# Altium PCB demo_board_dirty_routed_ddr.PcbDoc
Units mil, origin at the board's own origin, x right, y up, seen from the top; angles counter-clockwise.
Board outline 6000 x 4000 mil, 2 copper layers (Top Layer, Bottom Layer); 2 components, 43 nets, 316 pads, 70 vias.
Unrouted connection lines stored in the file: 75.
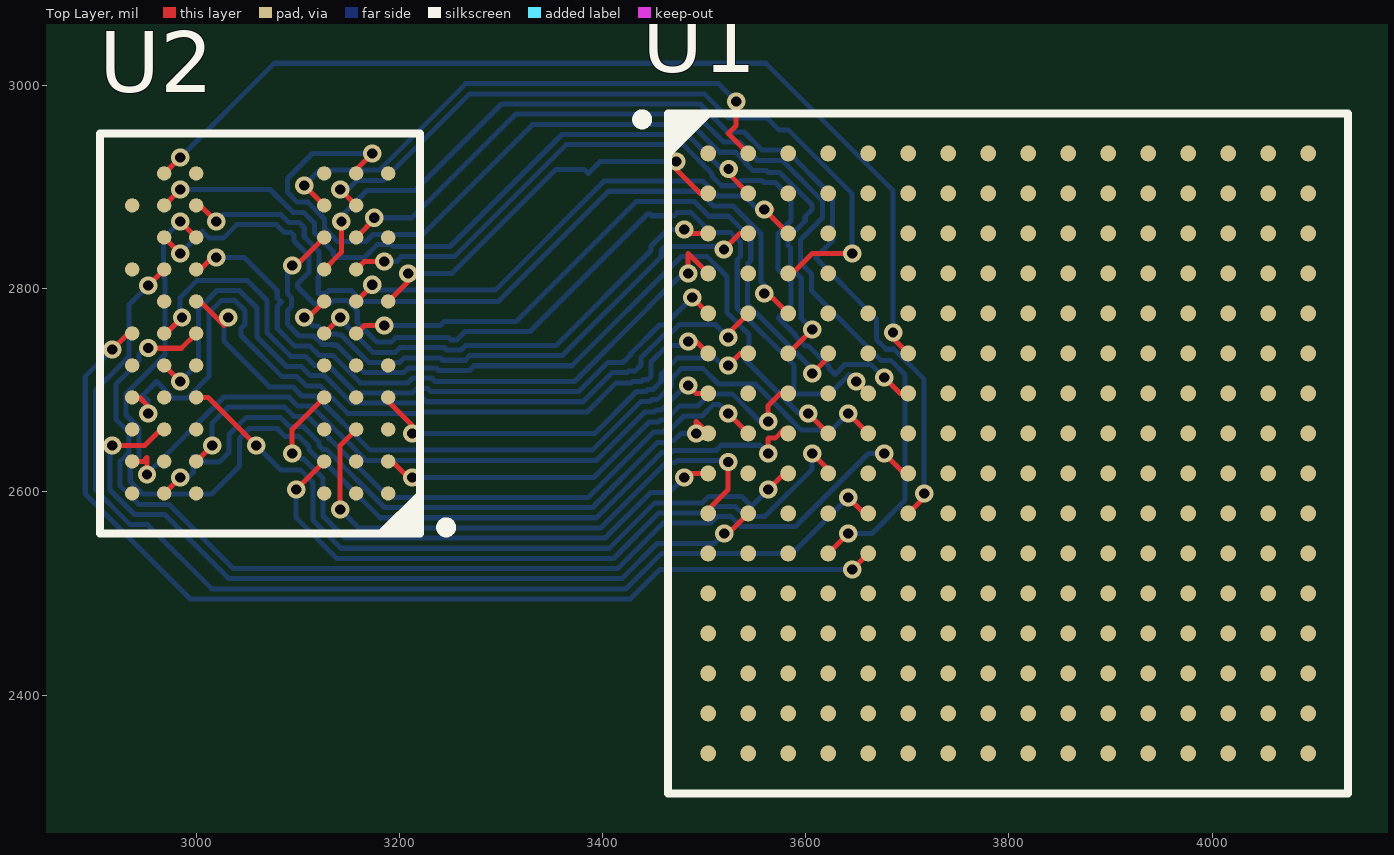
[diagram p0: Top Layer view]
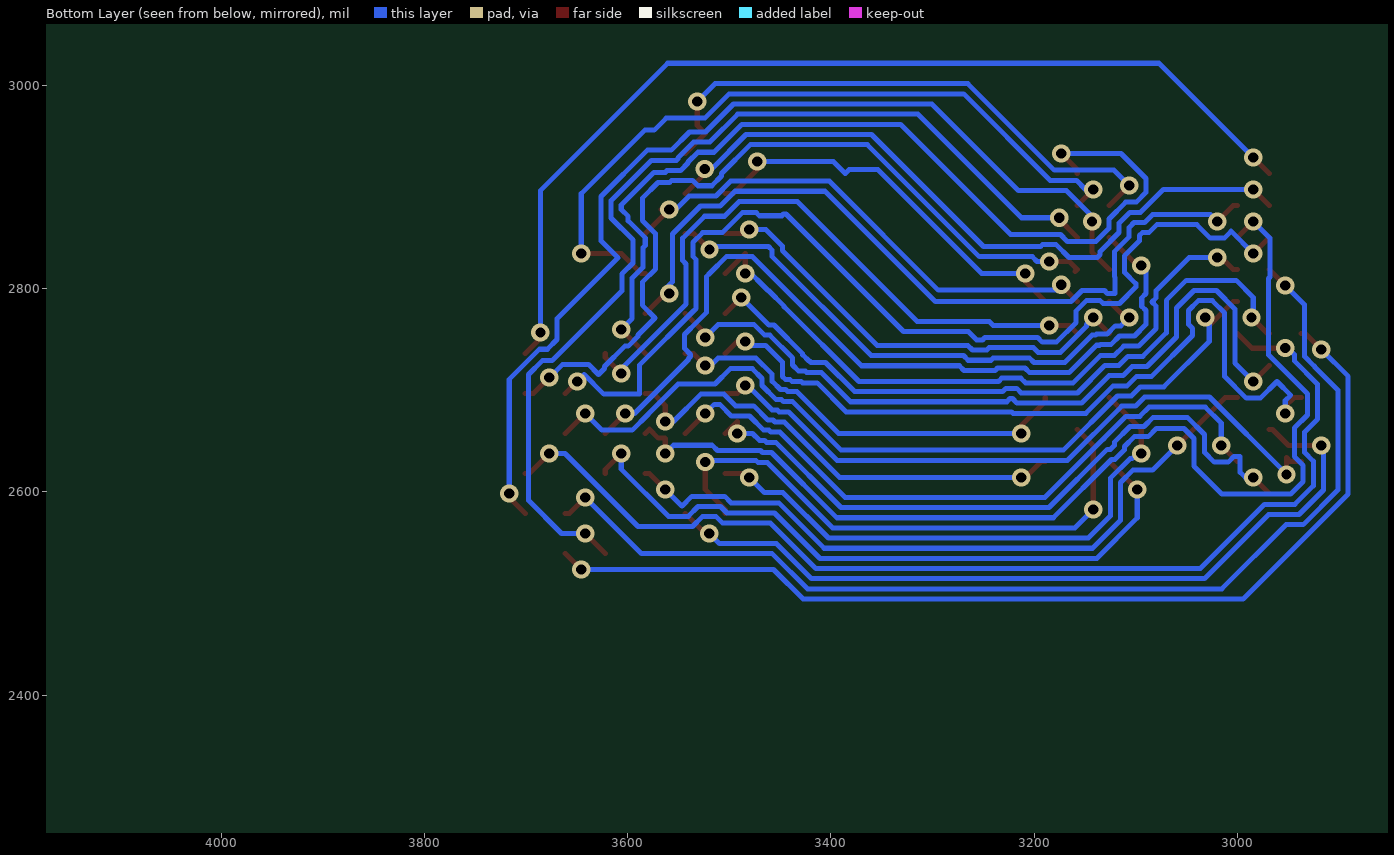
[diagram p1: Bottom Layer view, seen from below]

## Layer stack, top to bottom
Top Solder: solder mask 0.4, Solder Resist, Dk 3.5
Top Layer: signal copper 1.4
Dielectric 1: dielectric 12.6, FR-4, Dk 4.8
Bottom Layer: signal copper 1.4
Bottom Solder: solder mask 0.4, Solder Resist, Dk 3.5

## Board outline
1000,1000 7000,1000 7000,5000 1000,5000

## Design rules (kind name [scope] priority, off if disabled: settings)
Clearance [All] p1: gap=5
HoleSize [All] p1: absolutevalues=TRUE maxlimit=100 minlimit=10 maxpercent=80.000 minpercent=20.000
MinimumAnnularRing [All] p1: minimumring=4
PolygonConnect [All] p1: connectstyle=Relief reliefconductorwidth=10 reliefentries=4 polygonreliefangle="90 Angle" airgapwidth=10
RoutingVias [All] p1: holewidth=10 width=32 viastyle="Through Hole" minholewidth=10 minwidth=18 maxholewidth=50 maxwidth=100
SolderMaskExpansion [All] p1: expansion=4
UnpouredPolygon [All] p1: allowunpoured=FALSE
Width [All] p1: maxlimit=100 minlimit=5 preferedwidth=10
28 further rules are at their usual default settings.

## Classes and differential pairs
net class DDR: A0 A1 A2 A3 A4 A5 A6 A7 A8 A9 A10 A11 A12 A13 BA0 BA1 BA2 CAS# CK CK# CKE DM/RDQS DQ0 DQ1 DQ2 DQ3 DQ4 DQ5 DQ6 DQ7 DQS DQS# NetU2_A2 ODT RAS# WE#

## Components (designator, comment, footprint, x,y, rotation, side; value= is the part's Value field where it differs from the comment)
U1 "XC6SLX16-2FTG256C" Xilinx_FT256 3799.21,2637.8 r0 top
U2 "AS4C128M8D2-25BCN" Alliance_FBGA60 3062.99,2755.91 r180 top

## Footprints (in the part's own frame and the unit in brackets; to place one, negate y for a bottom-side part, rotate by r counter-clockwise, add the part's x,y. Pads: shape width x height; smd on the part's side, far side on the other; paste and mask are expansions set on the pad)
Alliance_FBGA60 [mm] "BGA, 60-Leads, Body 8.00x10.00mmx1.20mm, Pitch 0.80mm"
  round 0.36 smd: A1(-3.2,4) A2(-2.4,4) A3(-1.6,4) A7(1.6,4) A8(2.4,4) A9(3.2,4) B1(-3.2,3.2) B2(-2.4,3.2) B3(-1.6,3.2) B7(1.6,3.2) B8(2.4,3.2) B9(3.2,3.2) C1(-3.2,2.4) C2(-2.4,2.4) C3(-1.6,2.4) C7(1.6,2.4) C8(2.4,2.4) C9(3.2,2.4) D1(-3.2,1.6) D2(-2.4,1.6) D3(-1.6,1.6) D7(1.6,1.6) D8(2.4,1.6) D9(3.2,1.6) E1(-3.2,0.8) E2(-2.4,0.8) E3(-1.6,0.8) E7(1.6,0.8) E8(2.4,0.8) E9(3.2,0.8) F2(-2.4,0) F3(-1.6,0) F7(1.6,0) F8(2.4,0) F9(3.2,0) G1(-3.2,-0.8) G2(-2.4,-0.8) G3(-1.6,-0.8) G7(1.6,-0.8) G8(2.4,-0.8) H2(-2.4,-1.6) H3(-1.6,-1.6) H7(1.6,-1.6) H8(2.4,-1.6) H9(3.2,-1.6) J1(-3.2,-2.4) J2(-2.4,-2.4) J3(-1.6,-2.4) J7(1.6,-2.4) J8(2.4,-2.4) K2(-2.4,-3.2) K3(-1.6,-3.2) K7(1.6,-3.2) K8(2.4,-3.2) K9(3.2,-3.2) L1(-3.2,-4) L2(-2.4,-4) L3(-1.6,-4) L7(1.6,-4) L8(2.4,-4)
  silkscreen extent -4.78,-5 4,5, body extent -4,-5 4,5, height 1.2
Xilinx_FT256 [mm] "BGA, 256-Leads, Body 17.00x17.00mmx1.55mm, Pitch 1.00mm"
  round 0.4 smd: A1(-7.5,7.5) A2(-6.5,7.5) A3(-5.5,7.5) A4(-4.5,7.5) A5(-3.5,7.5) A6(-2.5,7.5) A7(-1.5,7.5) A8(-0.5,7.5) A9(0.5,7.5) A10(1.5,7.5) A11(2.5,7.5) A12(3.5,7.5) A13(4.5,7.5) A14(5.5,7.5) A15(6.5,7.5) A16(7.5,7.5) B1(-7.5,6.5) B2(-6.5,6.5) B3(-5.5,6.5) B4(-4.5,6.5) B5(-3.5,6.5) B6(-2.5,6.5) B7(-1.5,6.5) B8(-0.5,6.5) B9(0.5,6.5) B10(1.5,6.5) B11(2.5,6.5) B12(3.5,6.5) B13(4.5,6.5) B14(5.5,6.5) B15(6.5,6.5) B16(7.5,6.5) C1(-7.5,5.5) C2(-6.5,5.5) C3(-5.5,5.5) C4(-4.5,5.5) C5(-3.5,5.5) C6(-2.5,5.5) C7(-1.5,5.5) C8(-0.5,5.5) C9(0.5,5.5) C10(1.5,5.5) C11(2.5,5.5) C12(3.5,5.5) C13(4.5,5.5) C14(5.5,5.5) C15(6.5,5.5) C16(7.5,5.5) D1(-7.5,4.5) D2(-6.5,4.5) D3(-5.5,4.5) D4(-4.5,4.5) D5(-3.5,4.5) D6(-2.5,4.5) D7(-1.5,4.5) D8(-0.5,4.5) D9(0.5,4.5) D10(1.5,4.5) D11(2.5,4.5) D12(3.5,4.5) D13(4.5,4.5) D14(5.5,4.5) D15(6.5,4.5) D16(7.5,4.5) E1(-7.5,3.5) E2(-6.5,3.5) E3(-5.5,3.5) E4(-4.5,3.5) E5(-3.5,3.5) E6(-2.5,3.5) E7(-1.5,3.5) E8(-0.5,3.5) E9(0.5,3.5) E10(1.5,3.5) E11(2.5,3.5) E12(3.5,3.5) E13(4.5,3.5) E14(5.5,3.5) E15(6.5,3.5) E16(7.5,3.5) F1(-7.5,2.5) F2(-6.5,2.5) F3(-5.5,2.5) F4(-4.5,2.5) F5(-3.5,2.5) F6(-2.5,2.5) F7(-1.5,2.5) F8(-0.5,2.5) F9(0.5,2.5) F10(1.5,2.5) F11(2.5,2.5) F12(3.5,2.5) F13(4.5,2.5) F14(5.5,2.5) F15(6.5,2.5) F16(7.5,2.5) G1(-7.5,1.5) G2(-6.5,1.5) G3(-5.5,1.5) G4(-4.5,1.5) G5(-3.5,1.5) G6(-2.5,1.5) G7(-1.5,1.5) G8(-0.5,1.5) G9(0.5,1.5) G10(1.5,1.5) G11(2.5,1.5) G12(3.5,1.5) G13(4.5,1.5) G14(5.5,1.5) G15(6.5,1.5) G16(7.5,1.5) H1(-7.5,0.5) H2(-6.5,0.5) H3(-5.5,0.5) H4(-4.5,0.5) H5(-3.5,0.5) H6(-2.5,0.5) H7(-1.5,0.5) H8(-0.5,0.5) H9(0.5,0.5) H10(1.5,0.5) H11(2.5,0.5) H12(3.5,0.5) H13(4.5,0.5) H14(5.5,0.5) H15(6.5,0.5) H16(7.5,0.5) J1(-7.5,-0.5) J2(-6.5,-0.5) J3(-5.5,-0.5) J4(-4.5,-0.5) J5(-3.5,-0.5) J6(-2.5,-0.5) J7(-1.5,-0.5) J8(-0.5,-0.5) J9(0.5,-0.5) J10(1.5,-0.5) J11(2.5,-0.5) J12(3.5,-0.5) J13(4.5,-0.5) J14(5.5,-0.5) J15(6.5,-0.5) J16(7.5,-0.5) K1(-7.5,-1.5) K2(-6.5,-1.5) K3(-5.5,-1.5) K4(-4.5,-1.5) K5(-3.5,-1.5) K6(-2.5,-1.5) K7(-1.5,-1.5) K8(-0.5,-1.5) K9(0.5,-1.5) K10(1.5,-1.5) K11(2.5,-1.5) K12(3.5,-1.5) K13(4.5,-1.5) K14(5.5,-1.5) K15(6.5,-1.5) K16(7.5,-1.5) L1(-7.5,-2.5) L2(-6.5,-2.5) L3(-5.5,-2.5) L4(-4.5,-2.5) L5(-3.5,-2.5) L6(-2.5,-2.5) L7(-1.5,-2.5) L8(-0.5,-2.5) L9(0.5,-2.5) L10(1.5,-2.5) L11(2.5,-2.5) L12(3.5,-2.5) L13(4.5,-2.5) L14(5.5,-2.5) L15(6.5,-2.5) L16(7.5,-2.5) M1(-7.5,-3.5) M2(-6.5,-3.5) M3(-5.5,-3.5) M4(-4.5,-3.5) M5(-3.5,-3.5) M6(-2.5,-3.5) M7(-1.5,-3.5) M8(-0.5,-3.5) M9(0.5,-3.5) M10(1.5,-3.5) M11(2.5,-3.5) M12(3.5,-3.5) M13(4.5,-3.5) M14(5.5,-3.5) M15(6.5,-3.5) M16(7.5,-3.5) N1(-7.5,-4.5) N2(-6.5,-4.5) N3(-5.5,-4.5) N4(-4.5,-4.5) N5(-3.5,-4.5) N6(-2.5,-4.5) N7(-1.5,-4.5) N8(-0.5,-4.5) N9(0.5,-4.5) N10(1.5,-4.5) N11(2.5,-4.5) N12(3.5,-4.5) N13(4.5,-4.5) N14(5.5,-4.5) N15(6.5,-4.5) N16(7.5,-4.5) P1(-7.5,-5.5) P2(-6.5,-5.5) P3(-5.5,-5.5) P4(-4.5,-5.5) P5(-3.5,-5.5) P6(-2.5,-5.5) P7(-1.5,-5.5) P8(-0.5,-5.5) P9(0.5,-5.5) P10(1.5,-5.5) P11(2.5,-5.5) P12(3.5,-5.5) P13(4.5,-5.5) P14(5.5,-5.5) P15(6.5,-5.5) P16(7.5,-5.5) R1(-7.5,-6.5) R2(-6.5,-6.5) R3(-5.5,-6.5) R4(-4.5,-6.5) R5(-3.5,-6.5) R6(-2.5,-6.5) R7(-1.5,-6.5) R8(-0.5,-6.5) R9(0.5,-6.5) R10(1.5,-6.5) R11(2.5,-6.5) R12(3.5,-6.5) R13(4.5,-6.5) R14(5.5,-6.5) R15(6.5,-6.5) R16(7.5,-6.5) T1(-7.5,-7.5) T2(-6.5,-7.5) T3(-5.5,-7.5) T4(-4.5,-7.5) T5(-3.5,-7.5) T6(-2.5,-7.5) T7(-1.5,-7.5) T8(-0.5,-7.5) T9(0.5,-7.5) T10(1.5,-7.5) T11(2.5,-7.5) T12(3.5,-7.5) T13(4.5,-7.5) T14(5.5,-7.5) T15(6.5,-7.5) T16(7.5,-7.5)
  silkscreen extent -9.27,-8.5 8.5,8.5, body extent -8.5,-8.5 8.5,8.5, height 1.55

## Via types
v1: diameter 18, hole 10, Top Layer to Bottom Layer, 70 vias

## Nets (pads, with @x,y where several pads share a name; then routed paths per layer and width w, separated by ;. In a path a pad name is that pad's centre, name@x,y a point inside that pad or via, vN(x,y) a via of type N, cw(c..) or ccw(c..) an arc to the next point about the centre after c; other vN are vias at no path point)
A0: U1.K5 U2.H8 | length 1089.7
  Top Layer w5: v1(2952.76,2803.15) U2.H8 ; v1(3641.73,2594.49) 3657.48,2578.74 U1.K5
  Bottom Layer w5: v1(2952.76,2803.15) 2933.82,2784.22 2933.82,2733.32 2924.16,2723.66 2924.16,2723.37 2900.82,2700.03 2900.82,2602.03 2935.17,2567.67 2952.01,2567.67 3015.2,2504.49 3423.11,2504.49 3457.79,2539.17 3586.41,2539.17 v1(3641.73,2594.49)
A1: U1.K6 U2.H3 | length 1000.5
  Top Layer w5: U2.H3 3142.86,2835.77 v1(3142.86,2866.14) ; U1.K6 3716.54,2594.49 v1(3716.54,2598.43)
  Bottom Layer w5: v1(3142.86,2866.14) 3142.86,2871.21 3168.22,2896.57 3215.47,2896.57 3300.59,2981.69 3495.84,2981.69 3523.27,2954.25 3539.17,2954.25 3557.18,2936.25 3580.65,2936.25 3626.3,2890.6 3626.3,2847.13 3609.49,2830.33 3669.45,2770.37 3669.45,2749.98 3679.12,2740.32 3686.91,2740.32 3716.54,2710.69 v1(3716.54,2598.43)
A2: U1.D1 U2.H7 | length 668.6
  Top Layer w5: U2.H7 3003.94,2818.9 3015.74,2830.7 v1(3019.68,2830.7) ; v1(3484.24,2814.95) 3484.24,2834.64 U1.D1
  Bottom Layer w5: v1(3019.68,2830.7) 3047.24,2830.7 3079.79,2798.16 3079.79,2791.01 3083.99,2786.82 3079.79,2782.62 3079.79,2760.67 3097.12,2743.35 3111.74,2743.35 3120.79,2734.3 3134.46,2734.3 3161.48,2707.27 3208.44,2707.27 3213.01,2711.85 3231.85,2711.85 3235.04,2708.66 3372.41,2708.66 3445.93,2782.19 3445.93,2782.62 3461.46,2798.15 3461.9,2798.15 3484.25,2820.5 v1(3484.24,2814.95)
A3: U1.L4 U2.J2 | length 994.6
  Top Layer w5: U2.J2 v1@3176.02,2868.93 ; U1.L4 v1(3641.73,2559.06)
  Bottom Layer w5: v1(3175.18,2869.77) 3212.29,2869.77 3314.21,2971.69 3491.69,2971.69 3519.13,2944.25 3535.03,2944.25 3550.55,2928.73 3550.55,2927.71 3552.01,2926.25 3576.51,2926.25 3616.3,2886.46 3616.3,2869.44 3594.86,2848 3594.86,2825.22 3605.55,2814.53 3605.55,2797.92 3674.38,2729.09 3683.99,2729.09 3697.6,2715.48 3697.6,2591.59 3665.07,2559.06 v1(3641.73,2559.06)
A4: U1.G5 U2.J8 | length 1016
  Top Layer w5: U2.J8 v1(2984.25,2834.65) ; v1(3649.6,2708.66) U1.G5
  Bottom Layer w5: v1(2984.25,2834.65) 3006.04,2856.44 3012.84,2849.64 3026.51,2849.64 3039.83,2862.96 3079.14,2862.96 3087.03,2855.07 3093.46,2855.07 3096.36,2852.17 3096.36,2846.88 3110.98,2832.25 3110.98,2815.99 3099.79,2804.81 3099.79,2801.48 3116,2785.28 3132.02,2785.28 3134.9,2788.15 3148.57,2788.15 3158.56,2778.16 3158.56,2766.77 3178.05,2747.27 3191.87,2747.27 3196.44,2751.85 3248.42,2751.85 3250.75,2749.52 3256.51,2749.52 3264.71,2757.72 3328.58,2757.72 3444.25,2873.38 3446.67,2873.38 3448.34,2871.71 3470.42,2871.71 3473.47,2874.76 3487.14,2874.76 3506.83,2855.08 3526.2,2855.08 3535.86,2845.41 3535.86,2831.74 3532.55,2828.43 3532.55,2780.51 3534.59,2778.47 3588.52,2724.55 3588.52,2696.1 3623.43,2696.1 3642.79,2715.46 v1(3649.6,2708.66)
A5: U1.H4 U2.J3 | length 824
  Top Layer w5: v1@3094.48,2826.75 v1(3094.48,2822.83) 3098.42,2822.83 3106.3,2830.71 U2.J3 ; v1(3602.36,2677.17) U1.H4
  Bottom Layer w5: v1@3089.79,2822.83 3089.79,2795.15 3093.99,2790.96 3093.99,2782.68 3089.79,2778.48 3089.79,2764.81 3101.26,2753.35 3115.88,2753.35 3124.07,2745.15 3134.54,2745.15 3135.4,2744.3 3138.6,2744.3 3165.62,2717.27 3204.29,2717.27 3208.87,2721.85 3235.99,2721.85 3238.32,2719.52 3268.94,2719.52 3273.51,2724.09 3369.76,2724.09 3477.12,2831.45 3502.89,2831.45 3519.04,2815.31 3522.55,2811.8 3522.55,2776.36 3530.44,2768.47 3544.05,2754.87 3544.05,2741.19 3538.06,2735.2 3538.06,2733.31 3540.12,2731.24 3540.12,2730.36 3593.31,2677.17 v1(3602.36,2677.17)
A6: U1.H3 U2.J7 | length 1097.3
  Top Layer w5: v1(2984.25,2866.14) U2.J7 ; v1(3562.99,2637.8) 3562.99,2652.46 3563.31,2652.79 3569.82,2652.79 3578.6,2661.56 U1.H3
  Bottom Layer w5: v1(2984.25,2866.14) 2967.75,2849.64 2967.75,2811.49 2969.26,2809.98 2969.26,2734.83 2930.92,2696.49 2930.92,2675.67 2943.82,2662.77 2943.82,2634.69 2935.13,2626 2935.13,2610.15 2947.6,2597.67 3015,2597.67 3042.55,2625.23 3042.55,2652.5 3052.36,2662.31 3079.64,2662.31 3087.65,2654.3 3101.32,2654.3 3110.99,2644.63 3110.99,2641.43 3120.57,2631.85 3123.77,2631.85 3181.13,2574.49 3394.11,2574.49 3458.34,2638.71 3467.38,2638.71 3469.34,2640.67 3511.6,2640.67 3516.79,2645.86 3554.93,2645.86 v1(3562.99,2637.8)
A7: U1.D3 U2.K2 | length 735.8
  Top Layer w5: v1(3141.73,2897.63) U2.K2 ; U1.D3 3586.61,2814.96 3606.29,2834.64 v1(3645.66,2834.64)
  Bottom Layer w5: v1(3141.73,2897.63) 3149.27,2897.63 3158.21,2906.57 3184.2,2906.57 3269.32,2991.69 3500.07,2991.69 3524.02,2967.75 3562.13,2967.75 3573.94,2955.94 3583.13,2955.94 3645.66,2893.41 v1(3645.66,2834.64)
A8: U1.B2 U2.K8 | length 694.7
  Top Layer w5: U2.K8 v1(2984.25,2897.64) ; v1(3524.05,2917.75) 3524.05,2912.96 U1.B2
  Bottom Layer w5: v1(2984.25,2897.64) 3072.75,2897.64 3095.32,2875.07 3105.68,2875.07 3116.36,2864.39 3116.36,2855.16 3134.93,2836.59 3134.93,2833.58 3137.8,2830.71 3165.64,2830.71 3178.2,2843.27 3191.87,2843.27 3193.69,2841.45 3249.73,2841.45 3359.97,2951.69 3483.41,2951.69 3517.35,2917.75 v1(3524.05,2917.75)
A9: U1.A2 U2.K3 | length 564.3
  Top Layer w5: v1(3106.29,2901.57) U2.K3 ; v1(3531.49,2984.25) 3531.49,2960.64 3523.61,2952.76 U1.A2
  Bottom Layer w5: v1(3106.29,2901.57) 3121.29,2916.57 3180.06,2916.57 3265.18,3001.69 3514.04,3001.69 v1(3531.49,2984.25)
A10: U1.G6 U2.H2 | length 812.1
  Top Layer w5: U2.H2@3159.59,2816.79 U2.H2 3165.35,2826.77 v1(3185.04,2826.77) ; v1(3677.16,2712.59) 3692.9,2696.85 U1.G6
  Bottom Layer w5: v1(3185.04,2826.77) 3197.14,2826.77 3201.82,2831.45 3253.88,2831.45 3364.11,2941.69 3479.27,2941.69 3507.55,2913.41 3507.55,2910.92 3517.22,2901.25 3530.89,2901.25 3536.21,2906.57 3543.4,2906.57 3543.72,2906.25 3557.05,2906.25 3558.85,2904.45 3570.02,2904.45 3585.55,2888.92 3585.55,2866.97 3572.68,2854.1 3572.68,2819.12 3585.55,2806.25 3585.55,2783.68 3572.99,2771.12 3589.8,2754.31 3589.8,2753.01 3599.46,2743.34 3602.83,2743.34 3622.8,2723.37 3622.8,2721.31 3628.65,2715.46 3638.65,2725.46 3663.86,2725.46 3676.73,2712.59 v1(3677.16,2712.59)
A11: U1.E3 U2.K7 | length 791
  Top Layer w5: U2.K7 3003.92,2881.89 v1(3019.68,2866.14) ; v1(3559.05,2795.27) v1@3562.98,2795.27 ; v1@3562.99,2795.28 U1.E3
  Bottom Layer w5: v1(3019.68,2866.14) 3026.5,2872.96 3083.29,2872.96 3091.17,2865.07 3101.54,2865.07 3106.36,2860.25 3106.36,2851.02 3120.98,2836.4 3120.98,2811.85 3120.14,2811.01 3120.14,2795.28 3127.88,2795.28 3130.76,2798.15 3152.71,2798.15 3163.58,2787.28 3297.2,2787.28 3405.74,2895.83 3494.36,2895.83 3508.93,2881.25 3528.3,2881.25 3555.86,2853.7 3555.86,2806.77 3562.99,2799.64 3559.05,2795.71 v1(3559.05,2795.27)
A12: U1.F3 U2.L2 | length 932.1
  Top Layer w5: U2.L2 3157.48,2917.32 v1(3173.23,2933.07) ; U1.F3 v1(3606.3,2759.84)
  Bottom Layer w5: v1(3173.23,2933.07) 3114.46,2933.07 3089.79,2908.4 3089.79,2894.73 3099.46,2885.07 3109.83,2885.07 3126.36,2868.53 3126.36,2859.3 3139.21,2846.46 3167.25,2846.46 3174.06,2853.27 3223.06,2853.27 3331.48,2961.69 3487.55,2961.69 3514.99,2934.25 3530.89,2934.25 3540.55,2924.59 3540.55,2923.56 3547.87,2916.25 3561.19,2916.25 3562.99,2914.45 3574.17,2914.45 3606.3,2882.31 3606.3,2877.95 3599.49,2871.14 3599.49,2866.77 3582.68,2849.96 3582.68,2842.52 3584.86,2840.33 3584.86,2821.07 3595.55,2810.39 3595.55,2770.59 v1(3606.3,2759.84)
A13: U1.F6 U2.L8 | length 981.4
  Top Layer w5: U2.L8 v1(2984.25,2929.13) ; v1(3685.95,2756.82) 3685.95,2752.88 3685.04,2751.97 U1.F6
  Bottom Layer w5: v1(2984.25,2929.13) 3076.93,3021.81 3560.58,3021.81 3685.95,2896.44 v1(3685.95,2756.82)
BA0: U1.C3 U2.G2 | length 511.5
  Top Layer w5: U2.G2 3173.23,2803.15 v1(3173.23,2803.78) ; v1@3559.06,2877.95 3562.99,2881.87 3566.91,2877.95 3562.99,2874.02 U1.C3
  Bottom Layer w5: v1(3173.23,2803.78) 3178.56,2798.45 3294.23,2798.45 3401.6,2905.83 3498.5,2905.83 3513.08,2891.25 3539.49,2891.25 3552.79,2877.95 v1(3559.05,2877.95)
BA1: U1.C2 U2.G3 | length 542.2
  Top Layer w5: v1(3106.29,2771.65) 3110.23,2771.65 U2.G3 ; v1(3519.36,2838.58) 3535.12,2854.33 U1.C2
  Bottom Layer w5: v1(3106.29,2771.65) 3114.59,2763.35 3120.02,2763.35 3128.22,2755.15 3138.68,2755.15 3139.54,2754.3 3142.74,2754.3 3169.76,2727.27 3200.15,2727.27 3204.73,2731.85 3240.14,2731.85 3242.46,2729.52 3264.8,2729.52 3269.37,2734.09 3360.37,2734.09 3457.74,2831.47 3457.74,2837.74 3461.46,2841.45 3516.48,2841.45 v1(3519.36,2838.58)
BA2: U1.B1 U2.G1 | length 397.6
  Top Layer w5: U2.G1 3208.65,2807.08 v1(3208.65,2814.95) ; v1(3472.43,2925.19) 3472.43,2917.3 3476.36,2913.38 3496.06,2893.7 U1.B1
  Bottom Layer w5: v1(3208.65,2814.95) 3251.52,2814.95 3353.88,2917.32 3381.88,2917.32 3385.82,2913.38 3397.63,2925.19 v1(3472.43,2925.19)
CAS#: U1.H5 U2.G7 | length 833.3
  Top Layer w5: U2.G7 3003.94,2787.4 3027.56,2763.78 3023.62,2767.72 3027.55,2771.65 v1(3031.49,2771.65) ; v1(3641.73,2677.17) U1.H5
  Bottom Layer w5: v1(3031.49,2771.65) 3027.56,2767.72 3027.56,2748.03 3072.24,2703.35 3095.17,2703.35 3104.22,2694.3 3117.89,2694.3 3171.21,2640.97 3389.89,2640.97 3437.63,2688.71 3446.67,2688.71 3448.63,2690.67 3453.73,2690.67 3467.74,2704.69 3467.74,2711.55 3477.41,2721.22 3498.97,2721.22 3514.09,2706.1 3550.24,2706.1 3579.49,2676.84 3579.49,2676.7 3595.53,2660.67 3625.23,2660.67 v1(3641.73,2677.17)
CK: U1.E2 U2.E8 | length 768.2
  Top Layer w5: U2.E8 v1(2984.25,2708.66) ; v1(3523.62,2751.97) 3523.62,2755.9 U1.E2
  Bottom Layer w5: v1(2984.25,2708.66) 3002.43,2726.84 3002.43,2780.06 3020.51,2798.15 3042.47,2798.15 3059.79,2780.82 3059.79,2752.39 3088.83,2723.35 3103.45,2723.35 3112.51,2714.3 3126.18,2714.3 3153.2,2687.27 3216.72,2687.27 3221.3,2691.85 3223.57,2691.85 3226.76,2688.66 3380.69,2688.66 3409.31,2717.28 3423.77,2717.28 3425.2,2718.71 3431.6,2718.71 3437.75,2724.87 3437.75,2731.86 3460.08,2754.18 3465.17,2754.18 3475.52,2764.53 3511.06,2764.53 v1(3523.62,2751.97)
CK#: U1.E1 U2.F8 | length 684.4
  Top Layer w5: U2.F8 2970.18,2755.91 v1(2985.93,2771.65) ; v1(3488.18,2791.33) U1.E1
  Bottom Layer w5: v1(2985.93,2771.65) 2984.25,2773.33 2984.25,2791.34 3001.06,2808.15 3050.12,2808.15 3069.79,2788.47 3069.79,2756.53 3092.97,2733.35 3107.6,2733.35 3116.65,2724.3 3130.32,2724.3 3157.34,2697.27 3212.58,2697.27 3217.15,2701.85 3227.71,2701.85 3230.9,2698.66 3376.55,2698.66 3405.17,2727.28 3419.63,2727.28 3421.06,2728.71 3421.63,2728.71 3427.75,2734.84 3427.75,2736 3455.93,2764.18 3461.03,2764.18 v1(3488.18,2791.33)
CKE: U1.F4 U2.F2 | length 644.2
  Top Layer w5: U2.F2 3165.35,2763.77 v1(3185.03,2763.77) ; v1(3606.3,2716.54) 3622.05,2732.28 U1.F4
  Bottom Layer w5: v1(3185.03,2763.77) 3240.15,2763.77 3244.09,2767.72 3314.96,2767.72 3433.07,2885.83 3490.22,2885.83 3504.79,2871.25 3524.16,2871.25 3545.86,2849.55 3545.86,2827.6 3542.55,2824.29 3542.55,2784.66 3606.3,2720.91 v1(3606.3,2716.54)
DM/RDQS: U1.J4 U2.B3 | length 677.5
  Top Layer w5: v1(3098.42,2602.36) U2.B3 ; v1(3606.3,2637.8) 3622.05,2622.05 U1.J4
  Bottom Layer w5: v1(3098.42,2602.36) 3098.42,2574.36 3138.29,2534.49 3410.68,2534.49 3455.36,2579.17 3502.32,2579.17 3508.71,2585.56 3530.66,2585.56 3540.35,2575.86 3559.83,2575.86 3606.3,2622.33 v1(3606.3,2637.8)
DQ0: U1.K2 U2.C8 | length 793.4
  Top Layer w5: v1(2917.32,2645.66) 2949.48,2645.66 2965.23,2661.42 U2.C8 ; v1(3519.68,2559.06) 3523.62,2559.06 U1.K2
  Bottom Layer w5: v1(2917.32,2645.66) 2915.13,2643.47 2915.13,2601.86 2939.31,2577.67 2969.12,2577.67 3032.31,2514.49 3418.96,2514.49 3453.64,2549.17 3509.8,2549.17 v1(3519.68,2559.06)
DQ1: U1.K1 U2.C2 | length 561.4
  Top Layer w5: v1(3141.73,2582.67) 3141.73,2645.66 U2.C2 ; U1.K1 3503.94,2582.68 3523.62,2602.36 v1(3523.62,2629.36)
  Bottom Layer w5: v1(3141.73,2582.67) 3159.91,2564.49 3398.25,2564.49 3462.48,2628.71 3471.52,2628.71 3473.48,2630.67 3522.31,2630.67 v1(3523.62,2629.36)
DQ2: U1.J3 U2.D7 | length 704.5
  Top Layer w5: U2.D7 3011.8,2692.91 v1(3059.05,2645.66) ; v1(3562.99,2602.36) 3578.74,2618.11 U1.J3
  Bottom Layer w5: v1(3059.05,2645.66) 3083.42,2621.3 3102.82,2621.3 3114.93,2609.19 3114.93,2572 3142.43,2544.49 3406.54,2544.49 3451.22,2589.17 3498.18,2589.17 3504.57,2595.56 3536.8,2595.56 3546.49,2585.86 v1(3562.99,2602.36)
DQ3: U1.J1 U2.D3 | length 565.8
  Top Layer w5: v1(3094.49,2637.8) 3094.49,2661.42 U2.D3 ; v1(3480.32,2614.17) 3484.25,2618.11 U1.J1
  Bottom Layer w5: v1(3094.49,2637.8) 3094.49,2641.73 3103.42,2632.8 3105.45,2632.8 3124.93,2613.33 3124.93,2576.14 3146.58,2554.49 3402.4,2554.49 3447.08,2599.17 3465.31,2599.17 v1(3480.32,2614.17)
DQ4: U1.F2 U2.D1 | length 418.5
  Top Layer w5: U2.D1 3188.98,2688.97 3212.59,2665.35 v1(3212.59,2657.47) ; v1(3523.62,2724.41) 3535.43,2736.22 U1.F2
  Bottom Layer w5: v1(3212.59,2657.47) 3392.25,2657.47 3433.48,2698.71 3442.53,2698.71 3444.49,2700.67 3449.59,2700.67 3457.74,2708.83 3457.74,2715.7 3473.58,2731.53 3511.05,2731.53 3518.17,2724.41 v1(3523.62,2724.41)
DQ5: U1.F1 U2.D9 | length 800.3
  Top Layer w5: U2.D9 2944.16,2692.91 2952.76,2684.32 v1(2952.76,2677.17) ; v1(3484.24,2748.03) v1@3492.12,2748.03 ; v1@3492.13,2748.03 U1.F1
  Bottom Layer w5: v1(2952.76,2677.17) 2952.76,2689.83 2947.42,2695.17 2960.91,2708.66 2977.41,2692.16 2991.08,2692.16 3012.43,2713.5 3012.43,2775.92 3024.66,2788.15 3038.32,2788.15 3047.99,2778.48 3047.99,2764.81 3044.06,2760.88 3044.06,2753.98 3084.69,2713.35 3099.31,2713.35 3108.36,2704.3 3122.03,2704.3 3149.05,2677.27 3220.86,2677.27 3222.25,2678.66 3384.84,2678.66 3413.46,2707.28 3427.91,2707.28 3429.34,2708.71 3438.39,2708.71 3440.34,2710.67 3444.85,2710.67 3447.74,2713.57 3447.74,2719.84 3447.75,2727.72 3464.22,2744.18 3480.4,2744.18 v1(3484.24,2748.03)
DQ6: U1.G3 U2.B1 | length 465.9
  Top Layer w5: U2.B1 3192.91,2629.92 3208.67,2614.17 v1(3212.59,2614.17) ; v1(3562.99,2669.29) 3562.99,2685.04 3574.79,2696.85 U1.G3
  Bottom Layer w5: v1(3212.59,2614.17) 3391.36,2614.17 3445.91,2668.71 3454.95,2668.71 3456.91,2670.67 3462.01,2670.67 3476.02,2684.68 3493.81,2684.68 3505.23,2696.1 3528.02,2696.1 3554.84,2669.29 v1(3562.99,2669.29)
DQ7: U1.G1 U2.B9 | length 680.2
  Top Layer w5: U2.B9 2947.88,2629.92 2951.63,2633.67 v1(2951.63,2616.98) ; v1(3484.24,2704.72) 3492.11,2696.85 U1.G1
  Bottom Layer w5: v1(2951.63,2616.98) 2951.63,2617.7 2952.76,2618.84 3027.27,2693.35 3091.03,2693.35 3100.08,2684.3 3113.75,2684.3 3167.07,2630.97 3394.03,2630.97 3441.77,2678.71 3450.81,2678.71 3452.77,2680.67 3457.87,2680.67 3484.24,2707.05 v1(3484.24,2704.72)
DQS: U1.H2 U2.B7 | length 665.6
  Top Layer w5: U2.B7 v1(3015.75,2645.67) ; v1(3523.62,2677.17) U1.H2
  Bottom Layer w5: v1(3015.75,2645.67) 3015.75,2667.69 3031.41,2683.35 3086.88,2683.35 3095.94,2674.3 3109.61,2674.3 3130.99,2652.91 3130.99,2651.85 3132.05,2651.85 3189.41,2594.49 3385.83,2594.49 3450.05,2658.71 3459.1,2658.71 3461.05,2660.67 3466.15,2660.67 3480.16,2674.68 3497.95,2674.68 3509.37,2686.1 3514.69,2686.1 v1(3523.62,2677.17)
DQS#: U1.H1 U2.A8 | length 679.6
  Top Layer w5: U2.A8 v1(2984.25,2614.17) ; v1(3492.12,2657.47) 3492.12,2669.3 U1.H1
  Bottom Layer w5: v1(2984.25,2614.17) 2988.19,2610.24 2997.12,2619.17 2997.12,2634.92 3003.17,2634.92 3008.91,2629.17 3022.58,2629.17 3032.25,2638.83 3032.25,2656.34 3049.26,2673.35 3082.74,2673.35 3091.8,2664.3 3105.46,2664.3 3120.99,2648.77 3120.99,2645.57 3124.71,2641.85 3127.91,2641.85 3185.27,2584.49 3389.97,2584.49 3454.2,2648.71 3463.24,2648.71 3465.2,2650.67 3470.3,2650.67 3477.1,2657.47 v1(3492.12,2657.47)
GND: U1.A1 U1.A16 U1.B7 U1.B11 U1.D4 U1.D13 U1.E9 U1.G2 U1.G8 U1.G15 U1.H7 U1.H9 U1.H12 U1.J5 U1.J8 U1.K7 U1.K9 U1.L2 U1.L15 U1.M8 U1.N13 U1.P3 U1.R6 U1.R10 U1.T1 U1.T16 U2.A3 U2.A7 U2.B2 U2.B8 U2.D2 U2.D8 U2.E3 U2.E7 U2.G8 U2.J1 U2.K9
ODT: U1.L5 U2.F9 | length 1011.5
  Top Layer w5: v1(2917.32,2740.16) 2933.07,2755.91 U2.F9 ; v1(3645.67,2523.62) U1.L5
  Bottom Layer w5: v1(2917.32,2740.16) 2890.82,2713.65 2890.82,2597.89 2994.21,2494.49 3427.25,2494.49 3456.38,2523.62 v1(3645.67,2523.62)
RAS#: U1.J6 U2.F7 | length 1085.2
  Top Layer w5: v1(2952.76,2741.66) 2953.1,2741.32 2985.41,2741.32 U2.F7 ; v1(3677.17,2637.8) 3696.85,2618.11 U1.J6
  Bottom Layer w5: v1(2952.76,2741.66) 2950.32,2741.66 2943.82,2735.16 2943.82,2728.89 2920.92,2705.99 2920.92,2671.53 2933.82,2658.63 2933.82,2638.83 2925.13,2630.14 2925.13,2606 2943.46,2587.67 2973.26,2587.67 3036.45,2524.49 3414.82,2524.49 3459.5,2569.17 3506.46,2569.17 3512.85,2575.56 3526.52,2575.56 3536.21,2565.86 3589.77,2565.86 3661.7,2637.8 v1(3677.17,2637.8)
V0: U1.B4 U1.B9 U1.B13 U1.D7 U1.D10
V1: U1.D15 U1.G13 U1.J15 U1.K13 U1.N15 U1.R13
V2: U1.N7 U1.N10 U1.R4 U1.R8
V3: U1.D2 U1.G4 U1.J2 U1.K4 U1.N2 U2.A1 U2.E1 U2.E9 U2.H9 U2.L1
V3A: U2.A9 U2.C1 U2.C3 U2.C7 U2.C9
VAUX: U1.E5 U1.F8 U1.F11 U1.G10 U1.H6 U1.J10 U1.L6 U1.L9
VINT: U1.G7 U1.G9 U1.H8 U1.H10 U1.J7 U1.J9 U1.K8 U1.K10
WE#: U1.C1 U2.F3 | length 456.3
  Top Layer w5: U2.F3 v1(3141.73,2771.65) ; v1(3480.31,2858.26) v1@3484.24,2854.32 ; v1@3484.24,2854.33 U1.C1
  Bottom Layer w5: v1(3141.73,2771.65) 3148.56,2764.83 3148.56,2762.63 3173.91,2737.27 3196.01,2737.27 3200.58,2741.85 3244.28,2741.85 3246.61,2739.52 3260.66,2739.52 3265.23,2744.09 3354.33,2744.09 3447.74,2837.51 3447.74,2841.88 3464.12,2858.26 v1(3480.31,2858.26)
pads on no net: U1.A3 U1.A4 U1.A5 U1.A6 U1.A7 U1.A8 U1.A9 U1.A10 U1.A11 U1.A12 U1.A13 U1.A14 U1.A15 U1.B3 U1.B5 U1.B6 U1.B8 U1.B10 U1.B12 U1.B14 U1.B15 U1.B16 U1.C4 U1.C5 U1.C6 U1.C7 U1.C8 U1.C9 U1.C10 U1.C11 U1.C12 U1.C13 U1.C14 U1.C15 U1.C16 U1.D5 U1.D6 U1.D8 U1.D9 U1.D11 U1.D12 U1.D14 U1.D16 U1.E4 U1.E6 U1.E7 U1.E8 U1.E10 U1.E11 U1.E12 U1.E13 U1.E14 U1.E15 U1.E16 U1.F5 U1.F7 U1.F9 U1.F10 U1.F12 U1.F13 U1.F14 U1.F15 U1.F16 U1.G11 U1.G12 U1.G14 U1.G16 U1.H11 U1.H13 U1.H14 U1.H15 U1.H16 U1.J11 U1.J12 U1.J13 U1.J14 U1.J16 U1.K3 U1.K11 U1.K12 U1.K14 U1.K15 U1.K16 U1.L1 U1.L3 U1.L7 U1.L8 U1.L10 U1.L11 U1.L12 U1.L13 U1.L14 U1.L16 U1.M1 U1.M2 U1.M3 U1.M4 U1.M5 U1.M6 U1.M7 U1.M9 U1.M10 U1.M11 U1.M12 U1.M13 U1.M14 U1.M15 U1.M16 U1.N1 U1.N3 U1.N4 U1.N5 U1.N6 U1.N8 U1.N9 U1.N11 U1.N12 U1.N14 U1.N16 U1.P1 U1.P2 U1.P4 U1.P5 U1.P6 U1.P7 U1.P8 U1.P9 U1.P10 U1.P11 U1.P12 U1.P13 U1.P14 U1.P15 U1.P16 U1.R1 U1.R2 U1.R3 U1.R5 U1.R7 U1.R9 U1.R11 U1.R12 U1.R14 U1.R15 U1.R16 U1.T2 U1.T3 U1.T4 U1.T5 U1.T6 U1.T7 U1.T8 U1.T9 U1.T10 U1.T11 U1.T12 U1.T13 U1.T14 U1.T15 U2.A2 U2.E2 U2.L3 U2.L7